# Altium PCB KC_BaseBoard4CompareTest-V0.21.PcbDoc
Units mil, origin at the board's own origin, x right, y up, seen from the top; angles counter-clockwise.
Board outline 7472.83 x 3515.33 mil, 2 copper layers (Component Side, Bottom Layer), stack 12.8 mil thick; 72 components, 46 nets, 203 pads, 0 vias.
Unrouted connection lines stored in the file: 1.
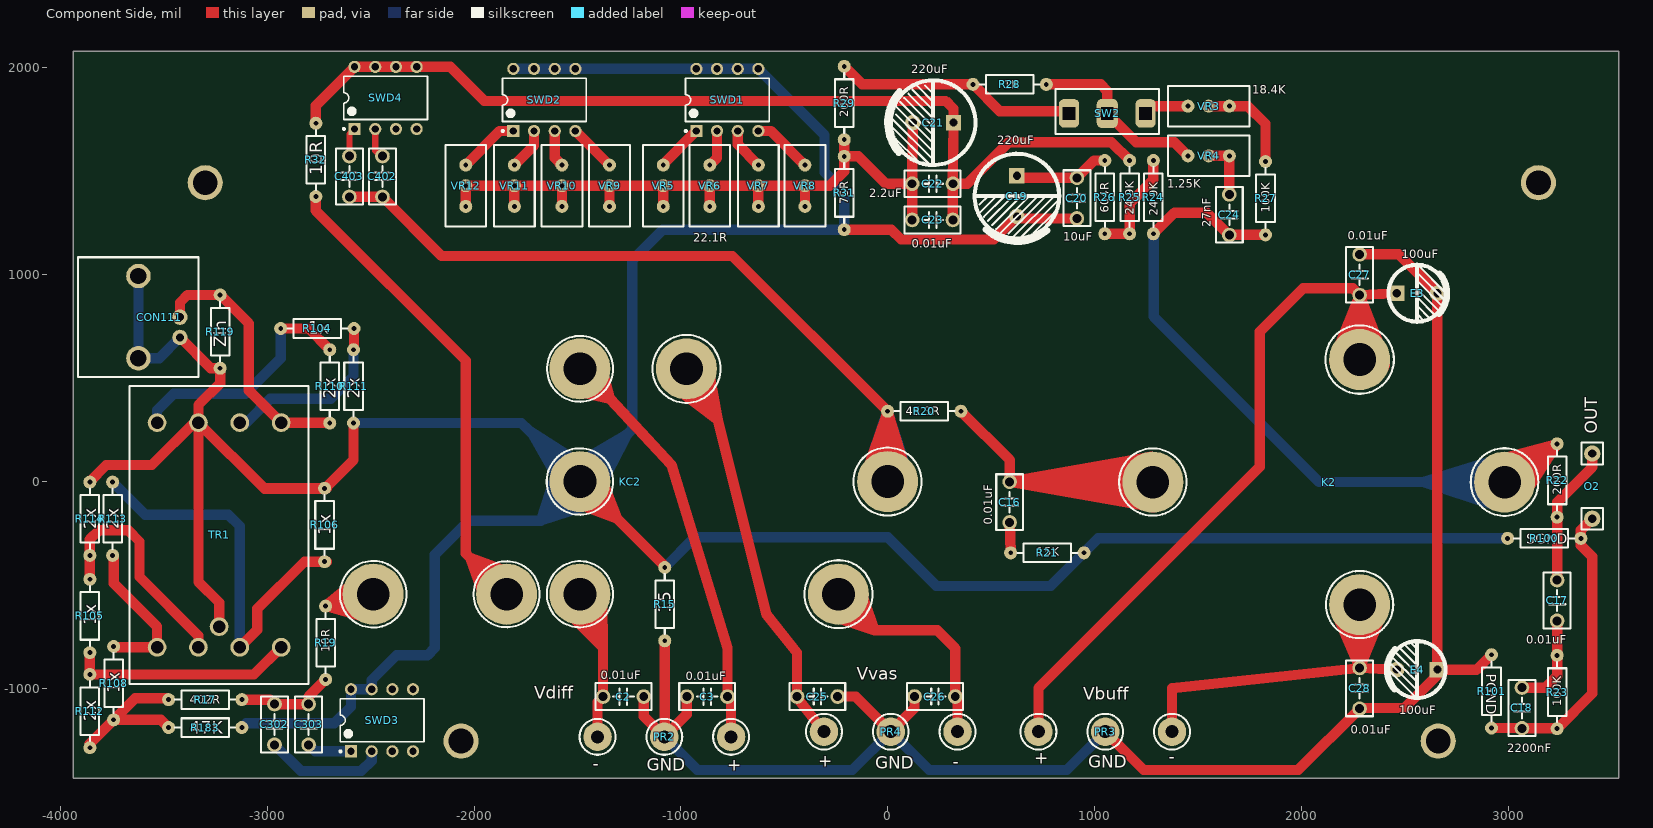
[diagram p0: Component Side view]
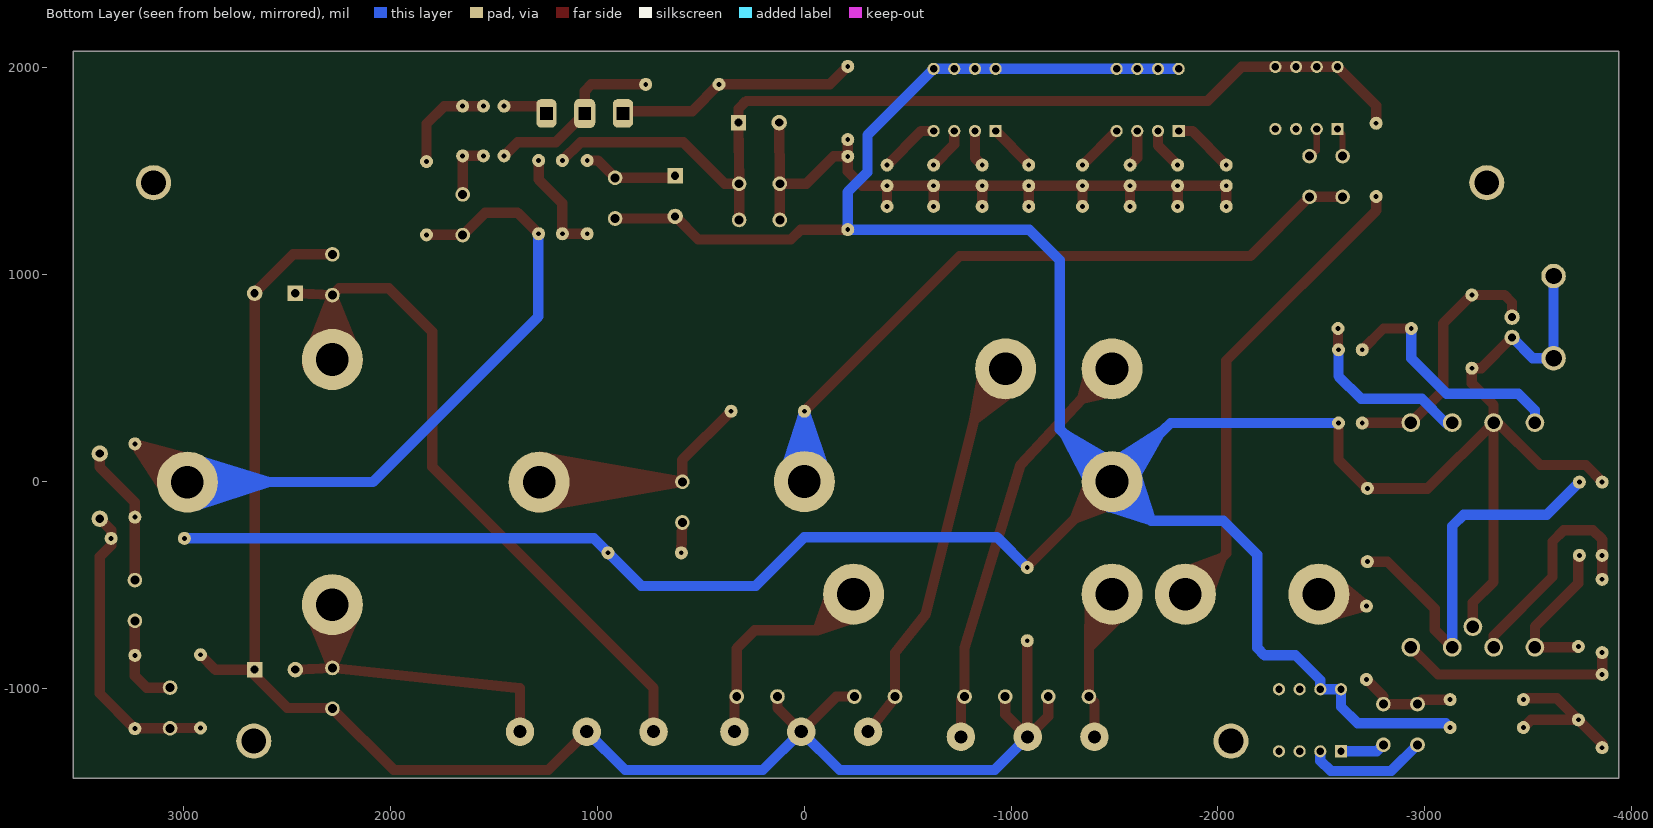
[diagram p1: Bottom Layer view, seen from below]

## Layer stack, top to bottom
Top Solder: solder mask 0.4, Solder Resist, Dk 3.5
Component Side: signal copper 1.4
Dielectric 1: core 10, FR-4, Dk 4.2
Bottom Layer: signal copper 1.4
Solder Side: solder mask 0.4, Solder Resist, Dk 3.5

## Board outline
-3937.83,-1435.33 -3937.83,2080 3535,2080 3535,-1435.33

## Design rules (kind name [scope] priority, off if disabled: settings)
Clearance [All] p1: gap=10 ignorepadtopadclearanceinfootprint=FALSE except(0: Arc-Hole Track-Hole SMDPad-Hole THPad-Hole Via-Hole Fill-Hole Poly-Hole Region-Hole Text-Hole)
PolygonConnect [All] p1: connectstyle=Relief reliefconductorwidth=10 reliefentries=4 polygonreliefangle="90 Angle" airgapwidth=10
RoutingVias [All] p1: holewidth=28 width=50 viastyle="Through Hole" minholewidth=28 minwidth=50 maxholewidth=28 maxwidth=50
SolderMaskExpansion [All] p1: expansion=4
Width [All] p1: maxlimit=500 minlimit=10 preferedwidth=50
30 further rules are at their usual default settings.

## Components (designator, comment, footprint, x,y, rotation, side; value= is the part's Value field where it differs from the comment)
C2 "0.01uF" "CBB 6.3*6.3*5" -1277.83,-1040.33 r0 top
C3 "0.01uF" "CBB 6.3*6.3*5" -872.83,-1040.33 r180 top
C16 "0.01uF" "CBB 6.3*6.3*5" 590,-100 r270 top
C17 "0.01uF" "CBB 6.3*6.3*5" 3237.17,-575.33 r90 top
C18 "2200nF" "CBB 6.3*6.3*5" 3067.17,-1095.33 r270 top
C19 "220uF" "CAP 5.0*10*12.5" 625,1380 r270 top
C20 "10uF" "CBB 6.3*6.3*5" 915,1370 r270 top
C21 "220uF" "CAP 5.0*10*12.5" 220,1735 r180 top
C22 "2.2uF" "CBB 6.3*6.3*5" 217.17,1439.67 r180 top
C23 "0.01uF" "CBB 6.3*6.3*5" 217.17,1264.67 r180 top
C24 "27nF" "CBB 6.3*6.3*5" 1652.17,1289.67 r90 top
C25 "0.01uF" "CBB 6.3*6.3*5" -340,-1040 r180 top
C26 "0.01uF" "CBB 6.3*6.3*5" 228.43,-1040 r180 top
C27 "0.01uF" "CBB 6.3*6.3*5" 2282.17,999.67 r90 top
C28 "0.01uF" "CBB 6.3*6.3*5" 2282.17,-1000.33 r270 top
C302 "100pF" "CBB 6.3*6.3*5" -2965,-1175 r90 top
C303 "20pF" "CBB 6.3*6.3*5" -2800,-1175 r90 top
C402 "100pF" "CBB 6.3*6.3*5" -2442.83,1474.67 r270 top
C403 "20pF" "CBB 6.3*6.3*5" -2602.83,1474.67 r270 top
CON111 "RCA" RCA-RJ255 -3622.83,794.67 r0 top
E3 "100uF" "CAP 5.0*6.5*12.5" 2560,910 r0 top
E4 "100uF" "CAP 5.0*6.5*12.5" 2560,-910 r180 top
K2 "KCBuff" KCBUFF_M4 1282.26,-2.83 r0 top
KC2 "KCInputVas_V0.2" KCIn_VAS_M4_V0.2 -1487.83,-0.33 r0 top
O2 "OUT" SIGNAL_TERMINAL 3407.17,134.67 r270 top
PR2 "Vdiff" KC_MBPOWERREG4COMPARE-1.5MM -1080,-1235 r270 top
PR3 "Vbuff" KC_MBPOWERREG4COMPARE-1.5MM 1052.17,-1210 r90 top
PR4 "Vvas" KC_MBPowerReg4Compare-1.5mm 15,-1210 r90 top
R15 "15" "RS 1/4W" -1077.83,-593.17 r270 top
R17 "402R" "RS 1/4W" -3300,-1055 r0 top
R19 "10R" "RS 1/4W" -2717.83,-780.33 r90 top
R20 "45.3R" "RS 1/4W" 177.17,339.67 r0 top
R21 "15K" "RS 1/4W" 772.17,-345 r0 top
R22 "200R" "RS 1/4W" 3237.17,4.67 r90 top
R23 "100K" "RS 1/4W" 3237.17,-1018.17 r270 top
R24 "24.9K" "RS 1/4W" 1285,1375 r270 top
R25 "24.9K" "RS 1/4W" 1170,1375 r270 top
R26 "604R" "RS 1/4W" 1050,1375 r270 top
R27 "100K" "RS 1/4W" 1827.17,1369.67 r90 top
R28 "1K" "RS 1/4W" 590,1920 r0 top
R29 "200R" "RS 1/4W" -210,1830 r270 top
R31 "75R" "RS 1/4W" -210,1395 r90 top
R32 "10R" "RS 1/4W" -2765,1555 r270 top
R100 "SGND" "RS 1/4W" 3175,-275.33 r0 top
R101 "PGND" "RS 1/4W" 2920,-1015 r270 top
R104 "1x" "RS 1/4W" -2757.83,739.67 r0 top
R105 "1x" "RS 1/4W" -3857.83,-650.33 r270 top
R106 "1x" "RS 1/4W" -2722.83,-210.33 r90 top
R108 "1x" "RS 1/4W" -3742.83,-975.33 r90 top
R110 "2x" "RS 1/4W" -2697.83,459.67 r270 top
R111 "2x" "RS 1/4W" -2582.83,459.67 r90 top
R112 "2x" "RS 1/4W" -3857.83,-1110.33 r90 top
R113 "2x" "RS 1/4W" -3747.83,-180.33 r90 top
R114 "2x" "RS 1/4W" -3857.83,-180.33 r90 top
R119 "Zin" "RS 1/4W" -3227.83,724.67 r270 top
R183 "47K" "RS 1/4W" -3300,-1190 r180 top
SW2 "SW-3P-2S" SS-12D06 1062.17,1779.67 r0 top
SWD1 "SW-DIP4" DIP-8 -775,1845 r90 top
SWD2 "SW-DIP4" DIP-8 -1660,1845 r90 top
SWD3 "SW-DIP4" DIP-8 -2445,-1155 r90 top
SWD4 "SW-DIP4" DIP-8 -2427.83,1854.67 r90 top
TR1 "LL1527" LL1527 -3232.83,-258.64 r270 top
VR3 "18.4K" "RS 1/2W-VR" 1552.17,1814.67 r180 top
VR4 "1.25K" "RS 1/2W-VR" 1552.17,1574.67 r180 top
VR5 "22.1R" "RS 1/2W-VR" -1085,1430 r90 top
VR6 "22.1R" "RS 1/2W-VR" -860,1430 r90 top
VR7 "VR-W" "RS 1/2W-VR" -625,1430 r90 top
VR8 "VR-W" "RS 1/2W-VR" -400,1430 r90 top
VR9 "VR-W" "RS 1/2W-VR" -1345,1430 r90 top
VR10 "VR-W" "RS 1/2W-VR" -1575,1430 r90 top
VR11 "VR-W" "RS 1/2W-VR" -1805,1430 r90 top
VR12 "VR-W" "RS 1/2W-VR" -2040,1430 r90 top

## Footprints (in the part's own frame and the unit in brackets; to place one, negate y for a bottom-side part, rotate by r counter-clockwise, add the part's x,y. Pads: shape width x height; smd on the part's side, far side on the other; paste and mask are expansions set on the pad)
"CAP 5.0*6.5*12.5" [mm] "脚距5mm直径10mm高度12.5mm"
  rect 1.9x1.9 hole 1: 1(-2.5,0)
  round 1.9 hole 1: 2(2.5,0)
  silkscreen extent -3.5,-3.5 3.7,3.56, body extent -5,-5.01 5.01,4.99, height 12.55
"CAP 5.0*10*12.5" [mm] "脚距5mm直径10mm高度12.5mm"
  rect 1.9x1.9 hole 1: 1(-2.5,0)
  round 1.9 hole 1: 2(2.5,0)
  silkscreen extent -5.2,-5.2 5.64,5.2, body extent -5,-5.01 5.01,4.99, height 12.55
"CBB 6.3*6.3*5" [mm] "脚距5mm高6.3mm厚3mm"
  round 1.8 hole 1.1: 1(-2.5,0) 2(2.5,0)
  silkscreen extent -3.43,-1.65 3.43,1.65, body extent -3.15,-1.5 3.15,1.5, height 6.8
DIP-8 [mm] "DIP; 8 Leads; Row Spacing 7.62 mm; Pitch 2.54 mm"
  rect 1.5x1.5 hole 0.9: 1(-3.81,3.81)
  round 1.5 hole 0.9: 2(-3.81,1.27) 3(-3.81,-1.27) 4(-3.81,-3.81) 5(3.81,-3.81) 6(3.81,-1.27) 7(3.81,1.27) 8(3.81,3.81)
  silkscreen extent -3.93,-5.15 2.65,5.23, body extent -3.6,-5.15 3.6,5.15, height 5.08
KC_MBPOWERREG4COMPARE-1.5MM [mm] "1.5mm hole size"
  round 3.5 hole 1.6: 1(0,8.2) 2(0,-8.2) 3(0,0)
  silkscreen extent -2.2,-10.4 2.2,10.4
KC_MBPowerReg4Compare-1.5mm [mm] "1.5mm hole size"
  round 3.5 hole 1.6: 1(0,8.2) 2(0,-8.2) 3(0,0)
  silkscreen extent -2.2,-10.4 2.2,10.4
KCBUFF_M4 [mm]
  round 7.5 hole 4: 1(0,0) 2(43.199,0) 3(25.397,15.05) 4(25.397,-15.05)
  silkscreen extent -4.13,-19.18 47.35,19.25
KCIn_VAS_M4_V0.2 [mm]
  round 7.5 hole 4: 1(-25.4,-13.843) 2(-9.004,-13.843) 3(0,13.843) 4(0,-13.843) 5(0,0) 6(37.782,0) 7(13.081,13.843) 8(31.75,-13.843)
  silkscreen extent -29.49,-18.02 41.96,18.02
LL1527 [mm] "Lundahl LL1527"
  round 2.3 hole 1.55: 1(-13.8,-7.62) 2(-13.8,-2.54) 3(-13.8,2.54) 4(-13.8,7.62) 5(13.8,-7.62) 6(13.8,-2.54) 7(13.8,2.54) 8(13.8,7.62) 9(11.26,0)
  silkscreen extent -18.3,-11 18.3,11
RCA-RJ255 [mm] "RCA Socket"
  round 1.9 hole 1: 1(5.1,0) 2(5.1,-2.5)
  round 3 hole 2.02: 2(0,-5.05) 2(0,5.05)
  silkscreen extent -7.4,-7.35 7.4,7.35
"RS 1/2W-VR" [mm] "直插3脚顶调可调电阻，脚距2.54mm，长10mm*宽5mm*高10mm"
  round 1.6 hole 0.6: 1(-2.54,0) 2(2.54,0) 3(0,0)
  silkscreen extent -5,-2.5 5,2.5
"RS 1/4W" [mm] "直插色环电阻，脚距9mm，直径2.3mm"
  round 1.6 hole 0.6: 1(-4.5,0) 2(4.5,0)
  silkscreen extent -3.68,-1.14 3.68,1.14, body extent -4.72,-1.16 4.73,1.16, height 2.32
SIGNAL_TERMINAL [mm] "Signal Path Pin"
  round 2 hole 1: 1(0,0) 2(8,0)
  silkscreen extent -1.35,-1.3 9.35,1.3
SS-12D06 [mm]
  rrect50% 2.5x3.5 hole 1.5 square: 1(-4.7,0) 3(4.7,0)
  rrect50% 2.6x3.6 hole 1.5 square: 2(0,0)
  silkscreen extent -6.35,-2.54 6.35,3

## Part data
C2 C3 C16 C17 C18 C20 C22 C23 C24 C25 C26 C27 C28 C302 C303 C402 C403: library part C-CBB, "CBB电容", BOM名称=CBB电容, 学习资源=www.ooocke.com, 版权归属=源创客
C19 C21 E3 E4: library part C-CAP, "直插电解电容", BOM名称=直插电解电容, 学习资源=www.ooocke.com, 版权归属=源创客
CON111: "RCA Connector", Publisher="Altium Limited", Revision="17-Jul-2002: Re-released for DXP Platform."
K2: "King Cello Buffer Stage"
KC2: "King Cello Input Stage and VAS"
O2: library part Signal_Out, "Signal Out"
PR2 PR3 PR4: library part MainBoardPowerRegulator4CompareTest, "King Cello Compare Test Power"
R15 R17 R19 R20 R21 R22 R23 R24 R25 R26 R27 R28 R29 R31 R32 R100 R101 R104 R105 R106 R108 R110 R111 R112 R113 R114 R119 R183: library part R-CRR, "直插色环电阻", BOM名称=色环电阻, 学习资源=www.ooocke.com, 版权归属=源创客
SW2: "3 Pin 2 Switch"
SWD1 SWD2 SWD3 SWD4: "DIP Switch", LatestRevisionDate=17-Jul-2002, LatestRevisionNote="Re-released for DXP Platform.", PackageReference=DIP-8, Published=24-Mar-1999, Publisher="Altium Limited"
TR1: "Lundahl LL1527"
VR3 VR4 VR5 VR6: library part VR-W, "直插可调电阻-顶调"
VR7 VR8 VR9 VR10 VR11 VR12: "直插可调电阻-顶调"

## Free pads (board coordinates)
  round 170 hole 120: 2(-3300,1444.67) 2(-2062.83,-1255.34) 2(2662.17,-1255.33) 2(3147.17,1444.67)

## Nets (pads, with @x,y where several pads share a name; then routed paths per layer and width w, separated by ;. In a path a pad name is that pad's centre, name@x,y a point inside that pad or via, vN(x,y) a via of type N, cw(c..) or ccw(c..) an arc to the next point about the centre after c; other vN are vias at no path point)
GND: C2.2 C3.2 C25.1 C26.2 C27.2 C28.2 E3.2 E4.1 PR2.3 PR3.3 PR4.3 R15.2 R101.1 | length 8379.4
  Component Side w50: C2.2 -1179.41,-1135.93 -1080,-1235.33 PR2.3@-1077.83,-1233.17 ; R15.2 PR2.3@-1077.83,-1233.17 ; C3.2 -971.26,-1126.59 PR2.3@-1077.83,-1233.17 ; C25.1 -155,-1040 PR4.3 130,-1095 C26.2 ; PR3.3 1237.17,-1395 1985.93,-1395 C28.2 2285.59,-1095.33 2500,-1095.33 2660,-935.33 E4.1@2660,-910 ; C27.2 2471.91,1098.09 E3.2@2660,910 ; E3.2 E4.1 E4.1@2660,-910 ; R101.1 2847.83,-910 E4.1@2660,-910
  Bottom Layer w50: PR2.3 -920,-1395 -170,-1395 PR4.3 200,-1395 867.17,-1395 PR3.3
NetC2_1: C2.1 KC2.4 PR2.2 | length 1530.9
  Component Side w50: KC2.4@-1530,-650 -1376.26,-805.33 ; KC2.4 -1376.26,-805.33 ; KC2.4@-1480,-670 -1376.26,-805.33 ; KC2.4@-1405,-620 -1376.26,-805.33 ; PR2.2@-1402.83,-1235.33 PR2.2 -1402.83,-1066.91 C2.1 -1376.26,-805.33 ; KC2.4@-1380,-575 -1376.26,-805.33
NetC3_1: C3.1 KC2.3 PR2.1 | length 2349.3
  Component Side w50: KC2.3@-1522.83,439.67 -1511.72,437.19 -1342.83,399.67 ; KC2.3 -1342.83,399.67 ; KC2.3@-1382.83,554.67 -1342.83,399.67 ; PR2.1@-757.17,-1235.33 PR2.1 -757.17,-1057.58 C3.1 -774.41,-805.33 -1045,80 -1342.83,399.67
NetC16_1: C16.1 K2.1 R20.2 | length 3702.9
  Component Side w50: R20.2 590,104 C16.1 ; K2.1@1170,-55 C16.1 ; K2.1@1175,50 C16.1 ; K2.1@1275,120 1260.91,117.5 C16.1 ; K2.1 1281.01,-1.57 C16.1 ; K2.1@1285,-125 1261.32,-120.79 C16.1
NetC16_2: C16.2 R21.1 | length 146.7
  Component Side w50: C16.2 R21.1
NetC17_1: C17.1 C17.2 C18.1 O2.1 R22.1 R23.1 | length 1142
  Component Side w50: C18.1 3180.59,-996.91 3237.17,-940.33 R23.1 C17.1 ; C17.2 R22.1 3237.17,-100.33 3407.17,69.67 O2.1
NetC18_2: C18.2 O2.2 R23.2 R100.2 R101.2 | length 1449.5
  Component Side w50: R101.2 3065.57,-1192.17 C18.2 3235.59,-1193.76 R23.2 3407.17,-1025.33 3407.17,-363.17 3352.17,-308.17 R100.2 3352.17,-235.3 O2.2
NetC19_1: C19.1 C20.1 R26.1 | length 463.8
  Component Side w50: C19.1 635,1468.43 C20.1 998.74,1552.17 R26.1
NetC19_2: C19.2 C20.2 CON111.2 KC2.5 R15.1 R21.2 R31.1 R100.1 R106.2 R111.1 R114.2 R119.2 R183.1 SWD1.5 SWD1.6 SWD1.7 SWD1.8 SWD2.5 SWD2.6 SWD2.7 SWD2.8 SWD3.7 SWD3.8 TR1.2 TR1.9 | length 21062.5
  Component Side w50: R114.2@-3857.83,-0.33 -3777.83,79.67 -3557.83,79.67 -3352.83,284.67 TR1.2 ; CON111.2@-3422.05,696.24 -3273.31,547.5 R119.2 -3227.83,474.67 -3332.83,369.67 TR1.2 ; TR1.9 -3232.83,-585.33 -3332.83,-485.33 TR1.2 ; R106.2@-2712.83,-33.17 R106.2@-2720.67,-33.17 ; R111.1 -2582.83,104.67 R106.2@-2720.67,-33.17 ; KC2.5 -1307.83,-180.33 ; KC2.5@-1482.83,-115.33 -1307.83,-180.33 ; KC2.5@-1367.83,-25.33 -1307.83,-180.33 ; R15.1 -1077.83,-410.33 -1307.83,-180.33 ; R31.1 17.17,1217.83 65,1170 513.43,1170 C19.2 635,1271.57 C20.2 ; TR1.2 -3015,-33.17 ; -3015,-33.17 R106.2 R106.2@-2720.67,-33.17 ; -3015,-33.17 -3012.83,-35.33 -2722.83,-35.33 R106.2@-2720.67,-33.17
  Bottom Layer w50: CON111.2@-3622.83,993.48 -3622.83,595.85 -3522.44,595.85 CON111.2@-3422.05,696.24 ; R183.1 -3102.83,-1170 -2675,-1170 -2595,-1090 SWD3.8 SWD3.7 -2495,-960 -2375,-840 -2225,-840 -2190,-805 -2190,-355 -2025,-190 -1677.5,-190 ; R111.1 -1770.67,282.5 -1737.83,249.67 ; SWD2.8 SWD2.7 SWD2.5 SWD1.8 SWD1.6 SWD1.5 -305,1675 -305,1495 -210,1400 R31.1 -1087.17,1217.83 -1235,1070 -1235,252.5 -1257.83,229.67 ; KC2.5@-1610,20 -1677.5,-190 ; KC2.5@-1605,-75 -1677.5,-190 ; KC2.5@-1577.83,-15.33 -1717.83,229.67 ; KC2.5@-1560,-105 -1677.5,-190 ; KC2.5@-1497.83,94.67 -1737.83,249.67 ; KC2.5@-1475,-125 -1677.5,-190 ; KC2.5@-1472.83,104.67 -1257.83,229.67 ; KC2.5@-1432.83,119.67 -1257.83,229.67 ; KC2.5@-1392.83,24.67 -1257.83,229.67 ; KC2.5@-1372.83,9.67 -1257.83,229.67 ; R15.1 -931.83,-270 0,-270 235.33,-505.33 789,-505.33 R21.2 1019,-275.33 R100.1 ; -1737.83,249.67 -1717.83,229.67 ; -1717.83,229.67 KC2.5 ; -1677.5,-190 KC2.5 ; KC2.5 -1257.83,229.67
NetC21_1: C21.1 C22.1 C23.1 R25.1 R32.1 SWD4.5 SWD4.6 SWD4.7 SWD4.8 | length 4844.2
  Component Side w50: R32.1 -2765,1817.5 SWD4.8 ; SWD4.8@-2580,2006.83 SWD4.8 ; C23.1 C22.1 ; R25.1 1082.17,1640 585,1640 384.67,1439.67 C22.1 ; SWD4.8 SWD4.7 SWD4.6 SWD4.5 -2114.67,2004.67 -1950,1840 280,1840 318.43,1801.57 C21.1 C22.1
NetC21_2: C21.2 C22.2 C23.2 R29.2 R31.2 VR5.1 VR5.3 VR6.1 VR6.3 VR7.1 VR7.3 VR8.1 VR8.3 VR9.1 VR9.3 VR10.1 VR10.3 VR11.1 VR11.3 VR12.1 VR12.3 | length 3665.8
  Component Side w50: VR12.1 VR12.3 VR11.3 ; VR11.1 VR11.3 ; VR10.1 VR10.3 ; VR9.1 VR9.3 ; VR5.1 VR5.3 ; VR6.1 VR6.3 ; VR7.1 VR7.3 ; VR8.1 VR8.3 ; R29.2 R31.2 ; C23.2 C22.2 ; C21.2 C22.2 ; VR11.3 VR10.3 ; VR10.3 VR9.3 ; VR9.3 VR5.3 ; VR5.3 VR6.3 ; VR6.3 VR7.3 ; VR7.3 VR8.3 ; VR8.3 -280,1430 -210,1500 R31.2 ; R31.2 -142.17,1572.17 -9.67,1439.67 C22.2
NetC24_1: C24.1 K2.2 R22.2 R24.2 R27.1 | length 5811.8
  Component Side w50: R24.2 1386.83,1299.67 1543.74,1299.67 C24.1 1653.43,1192.5 R27.1 ; K2.2@2930,100 2953.92,106.37 R22.2 ; K2.2 R22.2 ; K2.2@2985,90 R22.2 ; K2.2@3075,-20 R22.2 ; K2.2@3080,-60 R22.2
  Bottom Layer w50: R24.2 1287.17,1195.67 1287.17,797.5 2087.5,-2.83 2590,-2.83 ; K2.2@2860,35 2590,-2.83 ; K2.2@2885,-45 2590,-2.83 ; K2.2@2935,105 2590,-2.83 ; K2.2@2945.25,-118.67 2590,-2.83 ; K2.2 2590,-2.83
NetC24_2: C24.2 VR4.1 VR4.3 | length 286.6
  Component Side w50: VR4.3 VR4.1 C24.2
NetC25_2: C25.2 KC2.7 PR4.1 | length 2890
  Component Side w50: KC2.7@-1055,475 -1036.85,461.1 -820,295 ; KC2.7@-975,445 -820,295 ; KC2.7 -820,295 ; KC2.7@-890,495 -820,295 ; KC2.7@-865,535 -820,295 ; C25.2@-441.2,-1042.21 PR4.1 ; C25.2 -438.43,-829.33 -438.75,-829 -585,-645 -820,295
NetC26_1: C26.1 KC2.8 PR4.2 | length 1720.9
  Component Side w50: KC2.8 -63.17,-720 ; KC2.8@-230,-665 -63.17,-720 ; KC2.8@-180,-655 -63.17,-720 ; KC2.8@-130,-600 -63.17,-720 ; KC2.8@-125,-540 -63.17,-720 ; C26.1 326.85,-808.15 327.5,-807.5 240,-720 -63.17,-720 ; PR4.2 C26.1@337.83,-1032.83
NetC27_1: C27.1 E3.1 K2.3 PR3.1 | length 4563.4
  Component Side w50: PR3.1 729.33,-1000 1800,70.67 1800,725 2010,935 2248.41,935 C27.1 ; K2.3@2160,580 K2.3@2170.89,549.68 ; K2.3@2170,620 2174.95,632.42 C27.1 ; K2.3@2225,695 C27.1 ; K2.3 C27.1 ; K2.3@2335,690 C27.1 ; K2.3@2397.8,545.96 K2.3@2405,565 ; K2.3@2400,600 2387.87,631.01 C27.1 ; E3.1 C27.1
NetC28_1: C28.1 E4.2 K2.4 PR3.2 | length 2617.6
  Component Side w50: PR3.2 1375,-1000 C28.1 ; K2.4@2165,-625 2172.14,-641.89 C28.1 ; K2.4@2225,-715 C28.1 ; K2.4 C28.1 ; K2.4@2330,-705 C28.1 ; K2.4@2400,-615 2389.9,-639.58 C28.1 ; E4.2 C28.1
NetC302_1: C302.1 SWD3.2 | length 588.1
  Bottom Layer w50: C302.1 -2838.43,-1400 -2545,-1400 -2495,-1350 SWD3.2
NetC302_2: C302.2 C303.2 R17.2 R19.1 | length 484.9
  Component Side w50: R17.2 -2986.57,-1055 C302.2 C303.2 -2800,-1039.67 R19.1
NetC303_1: C303.1 SWD3.1 | length 218.1
  Bottom Layer w50: C303.1 -2768.43,-1305 SWD3.1
NetC402_1: C402.1 SWD4.2 | length 151
  Component Side w30: SWD4.2 -2477.83,1599.67 -2451.26,1573.09 C402.1
NetC402_2: C402.2 C403.2 KC2.6 R20.1 | length 6062.1
  Component Side w50: C403.2 C402.2 -2156.59,1090 -750.33,1090 R20.1 ; KC2.6@-92.83,69.67 R20.1 ; KC2.6@-57.83,84.67 R20.1 ; KC2.6 0,0 R20.1 ; KC2.6@57.17,84.67 R20.1 ; KC2.6@92.17,39.67 R20.1
  Bottom Layer w50: KC2.6@-115,5 -104.53,35.47 R20.1 ; KC2.6@-45,95 R20.1 ; KC2.6 R20.1 ; KC2.6@35,90 R20.1 ; KC2.6@115,-15 99.72,32.11 R20.1
NetC403_1: C403.1 SWD4.1 | length 141.9
  Component Side w30: C403.1 -2602.83,1679.67 SWD4.1
NetCON111_1: CON111.1 R110.2 R119.1 TR1.4 | length 1255.3
  Component Side w50: CON111.1 -3422.05,865.45 -3385.67,901.83 R119.1 -3090,764 -3090,441.83 TR1.4 -2700,284.67 R110.2
NetKC2_1: KC2.1 R19.2 | length 610.4
  Component Side w50: KC2.1@-2580,-490 R19.2 ; KC2.1@-2530,-655 R19.2 ; KC2.1 R19.2
NetKC2_2: KC2.2 R32.2 | length 2847.9
  Component Side w50: R32.2 -2765,1310 -2040,585 -2040,-347.67 -2017.58,-370.08 ; KC2.2@-1922.83,-635.33 -1942.24,-581.02 -2017.58,-370.08 ; KC2.2 -2017.58,-370.08 ; KC2.2@-1772.83,-460.33 -1806.42,-447.95 -2017.58,-370.08
NetR17_1: R17.1 R108.1 R112.1 R183.2 | length 775.6
  Component Side w50: R112.1 -3857.83,-1267.5 R108.1 ; R183.2 -3514.67,-1152.5 R108.1 ; R17.1 -3484,-1048.17 -3638.5,-1048.17 R108.1
NetR24_1: R24.1 R25.2 R26.2 | length 522
  Component Side w50: R26.2 R25.2 1170,1345 1285,1460 R24.1
NetR27_2: R27.2 VR3.1 VR3.3 | length 493
  Component Side w50: VR3.3 VR3.1 1742.17,1814.67 1827.17,1729.67 R27.2
NetR28_1: R28.1 R29.1 SW2.1 | length 1181.4
  Component Side w50: R29.1 -122.83,1920 R28.1 542.83,1790 866.79,1790 SW2.1
NetR28_2: R28.2 SW2.2 VR4.2 | length 891.4
  Component Side w50: R28.2 1030,1920 1062.17,1887.83 SW2.2 1201.83,1640 1386.83,1640 VR4.2
NetR104_1: R104.1 R110.1 TR1.1 | length 1186
  Component Side w50: R104.1 -2800.67,739.67 R110.1
  Bottom Layer w50: TR1.1 -3532.83,344.67 -3452.83,424.67 -3105.33,424.67 -2935,595 R104.1
NetR104_2: R104.2 R111.2 TR1.3 | length 871
  Component Side w50: R111.2@-2580.67,639 R104.2
  Bottom Layer w50: TR1.3 -3100.33,284.67 -2985,400 -2692.5,400 -2582.83,509.67 R111.2
NetR105_1: R105.1 R114.1 TR1.6 | length 1103.9
  Component Side w50: R105.1 R114.1 -3857.83,-280.33 -3812.83,-235.33 -3672.83,-235.33 -3617.83,-290.33 -3617.83,-460.33 -3332.83,-745.33 TR1.6
NetR105_2: R105.2 R112.2 TR1.8 | length 1085
  Component Side w50: R105.2 R112.2 -3064.05,-933.17 TR1.8
NetR106_1: R106.1 R113.2 TR1.7 | length 1940.7
  Component Side w50: TR1.7 -3047.83,-716.95 -3047.83,-615.33 -2820,-387.5 R106.1 R106.1@-2712.83,-387.5
  Bottom Layer w50: R113.2 -3590.67,-160.33 -3187.83,-160.33 -3132.83,-215.33 TR1.7
NetR108_2: R108.2 R113.1 TR1.5 | length 745.1
  Component Side w50: R113.1 -3742.83,-362.5 -3742.83,-492.5 -3532.83,-702.5 TR1.5 -3739.05,-801.95 R108.2
NetSW2_3: SW2.3 VR3.2 | length 219.5
  Component Side w50: SW2.3 1282.2,1814.67 VR3.2
NetSWD1_1: SWD1.1 VR5.2 | length 231.3
  Component Side w50: VR5.2 -1085,1535 SWD1.1
NetSWD1_2: SWD1.2 VR6.2 | length 179.5
  Component Side w50: VR6.2 -825,1565 SWD1.2
NetSWD1_3: SWD1.3 VR7.2 | length 206.4
  Component Side w50: SWD1.3 -725,1630 VR7.2
NetSWD1_4: SWD1.4 VR8.2 | length 293.3
  Component Side w50: SWD1.4 -565,1695 VR8.2
NetSWD2_1: SWD2.1 VR12.2 | length 298.3
  Component Side w50: VR12.2 -1875,1695 SWD2.1
NetSWD2_2: SWD2.2 VR11.2 | length 204.4
  Component Side w50: VR11.2 -1710,1625 SWD2.2
NetSWD2_3: SWD2.3 VR10.2 | length 179.5
  Component Side w50: SWD2.3 -1610,1565 VR10.2
NetSWD2_4: SWD2.4 VR9.2 | length 233.3
  Component Side w50: SWD2.4 VR9.2
pads on no net: SWD3.3 SWD3.4 SWD3.5 SWD3.6 SWD4.3 SWD4.4

## Silkscreen, mask and mechanical layers (free items; w line width, h text height)
Top Overlay:
  text "-" at 1360,-1360 h60
  text "+" at 710,-1365 h60
  text "+" at -335,-1380 h60
  text "-" at 315,-1385 h60
  text "GND" at 970,-1385 h60
  text "GND" at -60,-1390 h60
  text "-" at -1425,-1395 h60
  text "GND" at -1165,-1400 h60
  text "+" at -775,-1400 h60
Mechanical 1:
  the board outline again, w10
Drill Drawing:
  the board outline again, w10